# EAGLE board Fiberlink-pan2 (EAGLE 6.4)
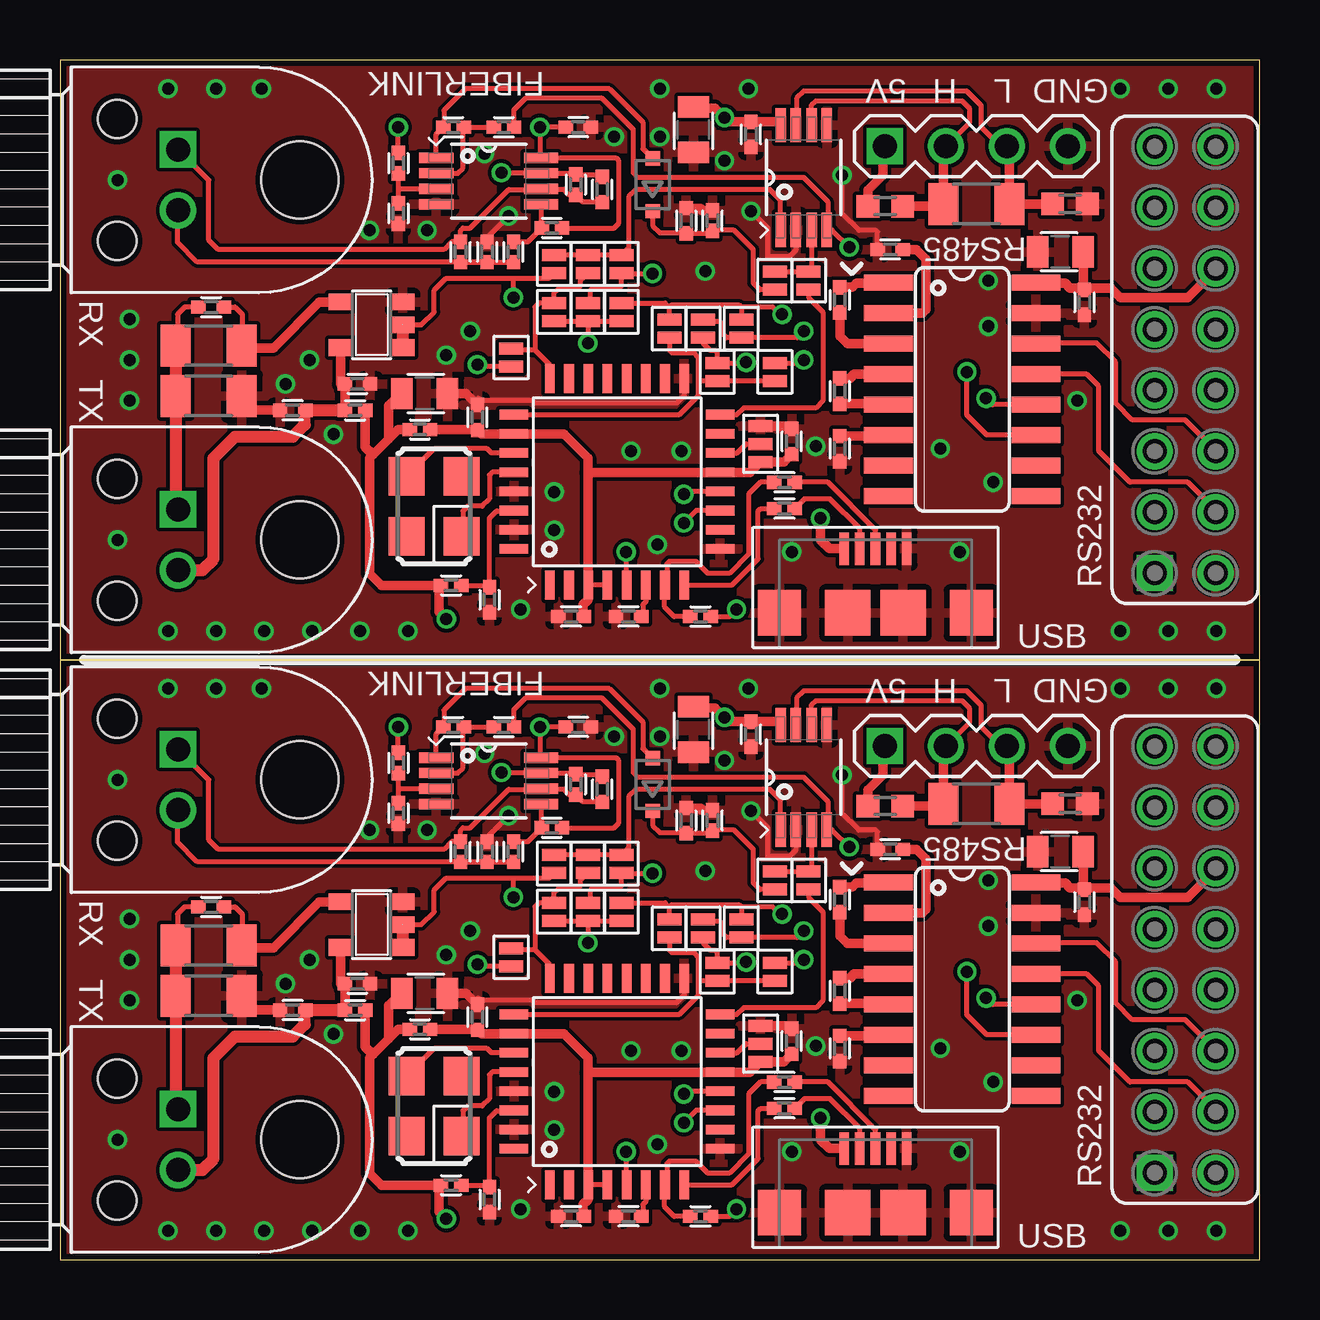
[diagram p0: board, top side]
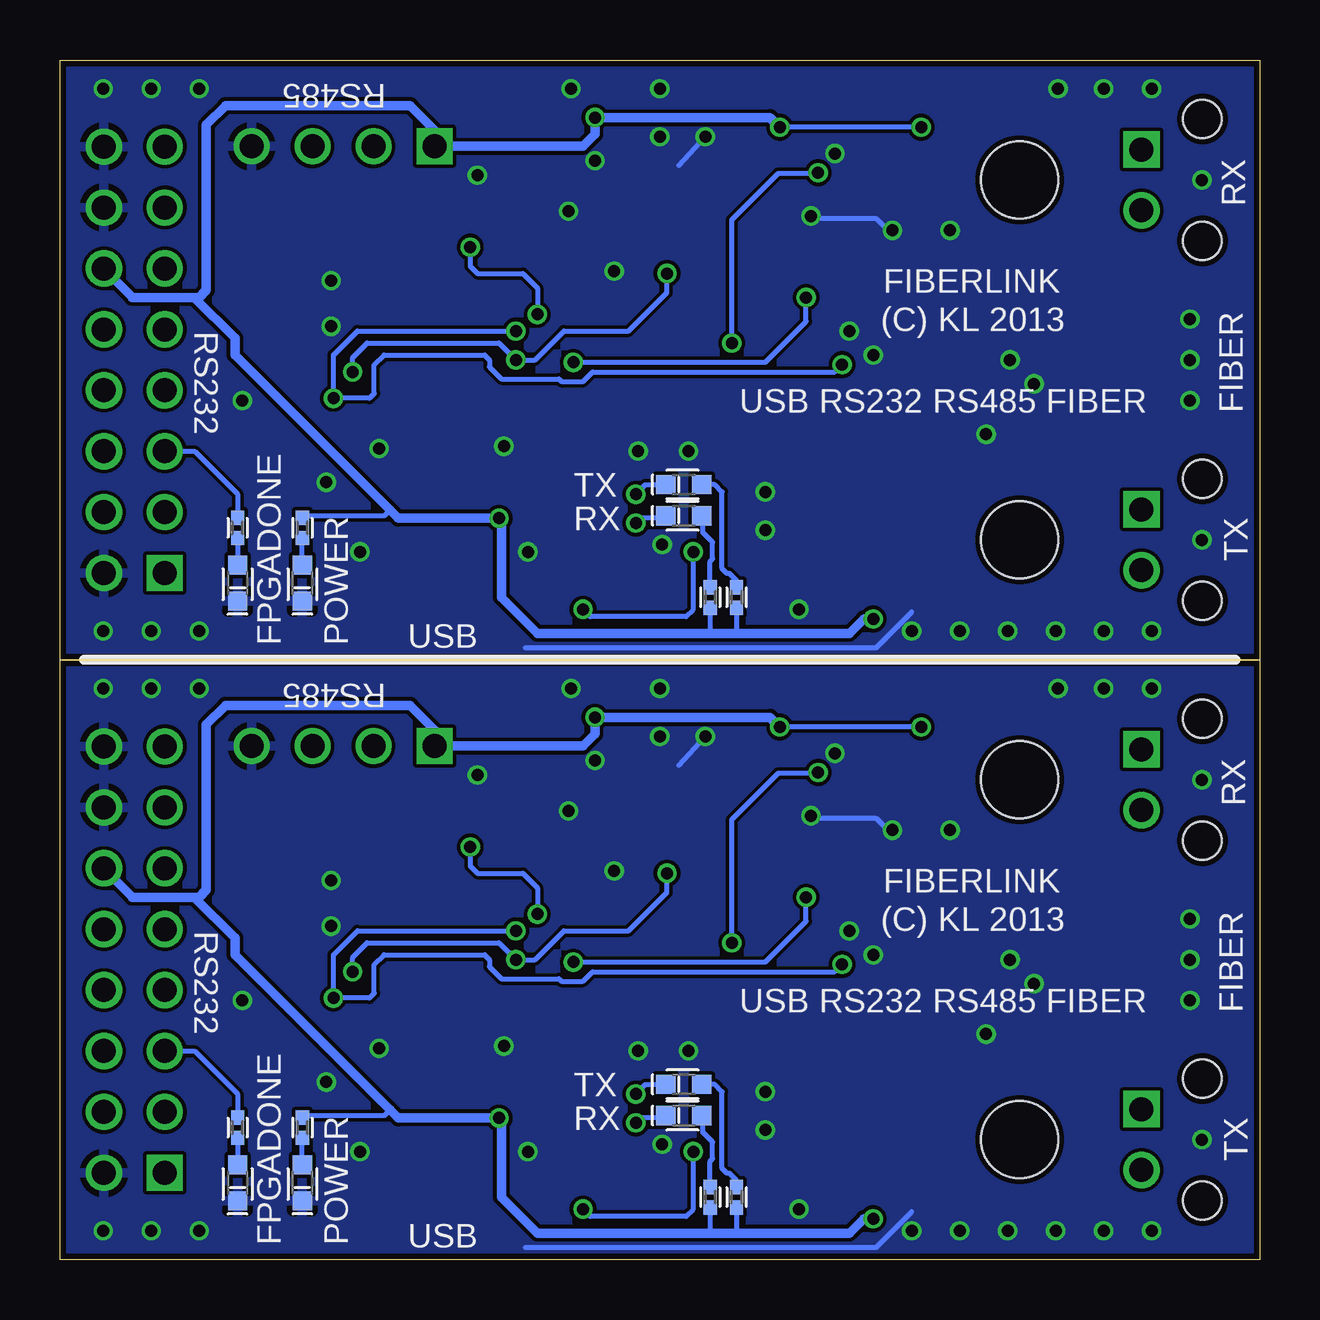
[diagram p1: board, bottom side, seen from below]

Size 50 x 50 mm. Coordinates in mm from the lower left corner, seen from the top.
Outline: 50,25 50,0 0,0 0,25
Outline: 50,25 0,25
Outline: 0,25 50,25
Outline: 50,25 50,50 0,50 0,25
Copper layers (1*16): Top 0.035mm / dielectric 1.5mm / Bottom 0.035mm
Design rules "ITEADstudio_DRC": minimum track width 6mil, minimum drill 12mil, track to track 6mil, track to pad 6mil, pad to pad 6mil, via to via 6mil, smd to smd 0mil, copper to edge 10mil, drill to drill 10mil, minimum pad ring 10mil, minimum via ring 6mil, stop-mask expansion 2mil, vias tented up to drill 100mil, thermal gap 10mil

## Footprints (pad centres in the part's own frame; a part is rotated, then mirrored left to right if it is on the bottom)
C0402 = smd 0.6 x 0.55: 1 -0.525,0; 2 0.525,0
C0805 = smd 0.9 x 1.3: 1 -0.95,0; 2 0.95,0
SOP65P490X110-8N = smd 1.422 x 0.432: 1 -2.184,0.965; 2 -2.184,0.33; 3 -2.184,-0.33; 4 -2.184,-0.965; 5 2.184,-0.965; 6 2.184,-0.33; 7 2.184,0.33; 8 2.184,0.965
SO16 = smd 0.66 x 2.032: 1 -4.445,-3.073; 2 -3.175,-3.073; 3 -1.905,-3.073; 4 -0.635,-3.073; 5 0.635,-3.073; 6 1.905,-3.073; 7 3.175,-3.073; 8 4.445,-3.073; 9 4.445,3.073; 10 3.175,3.073; 11 1.905,3.073; 12 0.635,3.073; 13 -0.635,3.073; 14 -1.905,3.073; 15 -3.175,3.073; 16 -4.445,3.073
SOT23-5 = smd 0.69 x 0.99: 1 -0.95,-1.29; 2 0,-1.29; 3 0.95,-1.29; 4 0.95,1.3; 5 -0.95,1.3
LQFP32 = smd 0.4 x 1.2: 1 -2.8,-4.3; 2 -2,-4.3; 3 -1.2,-4.3; 4 -0.4,-4.3; 5 0.4,-4.3; 6 1.2,-4.3; 7 2,-4.3; 8 2.8,-4.3; 17 2.8,4.3; 18 2,4.3; 19 1.2,4.3; 20 0.4,4.3; 21 -0.4,4.3; 22 -1.2,4.3; 23 -2,4.3; 24 -2.8,4.3 | smd 1.2 x 0.4: 9 4.3,-2.8; 10 4.3,-2; 11 4.3,-1.2; 12 4.3,-0.4; 13 4.3,0.4; 14 4.3,1.2; 15 4.3,2; 16 4.3,2.8; 25 -4.3,2.8; 26 -4.3,2; 27 -4.3,1.2; 28 -4.3,0.4; 29 -4.3,-0.4; 30 -4.3,-1.2; 31 -4.3,-2; 32 -4.3,-2.8
X_3225 = smd 1.6 x 1.5: 1 -1.25,-1.15; 2 1.25,-1.15; 3 1.25,1.15; 4 -1.25,1.15
IFO-IFX = drill 1 square: 1 -5.08,1.27 | drill 1: 2 -5.08,-1.27 | hole 3.2: 0,0 | hole 1.6: -7.62,2.54; -7.62,-2.54
CHIP-LED0603 = smd 0.8 x 0.8: A -0.75,0; C 0.75,0
R0402_VISHAY = smd 0.6 x 0.55: 1 -0.425,0; 2 0.425,0
R1206 = smd 1.25 x 1.75: 1 -1.375,0; 2 1.375,0
R0603 = smd 0.95 x 0.95: 1 -0.725,0; 2 0.725,0
SJ-SMALL = smd 0.5 x 1: 1 -0.375,0; 2 0.375,0
SJ-SMALL-TRI = smd 0.5 x 1: 1 -0.75,0; 2 0.75,0; 3 0,0
SOD323-R = smd 0.6 x 0.6: A 1.1,0; C -1.1,0
629105136821 = smd 0.4 x 1.35: 1 -1.3,0; 2 -0.65,0; 3 0,0; 4 0.65,0; 5 1.3,0 | smd 1.8 x 1.9: Z1 -4,-2.675; Z4 4,-2.675 | smd 1.9 x 1.9: Z2 -1.15,-2.675; Z3 1.15,-2.675
FE08-2 = drill 1 square: 1 -8.89,1.27 | drill 1: 2 -8.89,-1.27; 3 -6.35,1.27; 4 -6.35,-1.27; 5 -3.81,1.27; 6 -3.81,-1.27; 7 -1.27,1.27; 8 -1.27,-1.27; 9 1.27,1.27; 10 1.27,-1.27; 11 3.81,1.27; 12 3.81,-1.27; 13 6.35,1.27; 14 6.35,-1.27; 15 8.89,1.27; 16 8.89,-1.27
MA04-1 = drill 1 square: 1 -3.81,0 | drill 1: 2 -1.27,0; 3 1.27,0; 4 3.81,0

## Placement (x,y rotation side)
C1  [C0402]  22.6,19.6 90 top
C2  [C0402]  21.6,22.2 180 top
C3  [C0402]  32.5,15 270 top
C4  [C0402]  32.5,11.2 270 top
C5  [C0402]  34.6,17.1 180 top
C6  [C0402]  32.5,8.8 270 top
C7  [C0402]  42.7,14.9 270 top
C8  [C0402]  12.4,11.5 0 top
C9  [C0402]  6.3,14.7 0 top
C10  [C0402]  17.9,2.5 270 top
C11  [C0402]  23.7,1.8 180 top
C12  [C0402]  17.4,10.1 90 top
C13  [C0402]  21.3,1.8 180 top
C14  [C0402]  30.5,9.1 90 top
C15  [C0402]  28.8,21.9 90 top
C16  [C0402]  26.1,18.3 270 top
C17  [C0402]  9.7,10.4 180 top
C18  [C0805]  41.7,17 180 top
C19  [C0805]  15.2,11.1 0 top
C20  [C0805]  26.4,22.1 270 top
C21  [C0402]  22.6,44.6 90 top
C22  [C0402]  21.6,47.2 180 top
C23  [C0402]  32.5,40 270 top
C24  [C0402]  32.5,36.2 270 top
C25  [C0402]  34.6,42.1 180 top
C26  [C0402]  32.5,33.8 270 top
C27  [C0402]  42.7,39.9 270 top
C28  [C0402]  12.4,36.5 0 top
C29  [C0402]  6.3,39.7 0 top
C30  [C0402]  17.9,27.5 270 top
C31  [C0402]  23.7,26.8 180 top
C32  [C0402]  17.4,35.1 90 top
C33  [C0402]  21.3,26.8 180 top
C34  [C0402]  30.5,34.1 90 top
C35  [C0402]  28.8,46.9 90 top
C36  [C0402]  26.1,43.3 270 top
C37  [C0402]  9.7,35.4 180 top
C38  [C0805]  41.7,42 180 top
C39  [C0805]  15.2,36.1 0 top
C40  [C0805]  26.4,47.1 270 top
D1  SN65HVD3088EDMSOP  [SOP65P490X110-8N]  31,20.1 90 top
D2  MAX3232CSE  [SO16]  37.61,11.27 270 top
D3  74LVC1G08DBV  [SOT23-5]  12.99,13.96 90 top
D4  FT232BL  [LQFP32]  23.22,7.42 0 top
D5  MAX3232CSE  [SO16]  37.61,36.27 270 top
D6  74LVC1G08DBV  [SOT23-5]  12.99,38.96 90 top
D7  FT232BL  [LQFP32]  23.22,32.42 0 top
D8  SN65HVD3088EDMSOP  [SOP65P490X110-8N]  31,45.1 90 top
DRILEGEND  [DRILEGEND]  -9.63,-4.01 0 top  (outside the outline)
G1  XTAL_3225_SMD  [X_3225]  15.59,6.4 90 top
G2  XTAL_3225_SMD  [X_3225]  15.59,31.4 90 top
H1  IFE91A  [IFO-IFX]  10,5 0 top
H2  [CHIP-LED0603]  39.9,3.2 270 bottom
H3  [CHIP-LED0603]  24,7.3 180 bottom
H4  [CHIP-LED0603]  24,6 180 bottom
H5  [CHIP-LED0603]  42.6,3.2 270 bottom
H6  IFE91A  [IFO-IFX]  10,30 0 top
H7  [CHIP-LED0603]  24,32.3 180 bottom
H8  [CHIP-LED0603]  24,31 180 bottom
H9  [CHIP-LED0603]  39.9,28.2 270 bottom
H10  [CHIP-LED0603]  42.6,28.2 270 bottom
L1  [R0402_VISHAY]  15,9.6 0 top
L2  [R0402_VISHAY]  12.3,10.4 0 top
L3  [R0402_VISHAY]  15,34.6 0 top
L4  [R0402_VISHAY]  12.3,35.4 0 top
N1  MAX412CPAMSOP  [SOP65P490X110-8N]  17.87,19.95 0 top
N2  MAX412CPAMSOP  [SOP65P490X110-8N]  17.87,44.95 0 top
R1  [R0402_VISHAY]  16.7,17 90 top
R2  [R0402_VISHAY]  20.5,18 0 top
R3  [R0402_VISHAY]  17.8,17 270 top
R4  [R0402_VISHAY]  21.5,19.8 270 top
R5  [R0402_VISHAY]  18.9,17 90 top
R6  [R1206]  6.2,11 180 top
R7  [R1206]  6.2,13.1 180 top
R8  [R0402_VISHAY]  16.4,22.2 0 top
R9  [R0402_VISHAY]  14.1,18.6 270 top
R10  [R0402_VISHAY]  16.3,3.1 0 top
R11  [R0402_VISHAY]  21.8,2.6 270 bottom
R12  [R0402_VISHAY]  22.9,2.6 270 bottom
R13  [R0402_VISHAY]  39.9,5.5 270 bottom
R14  [R0402_VISHAY]  42.6,5.5 270 bottom
R15  [R0402_VISHAY]  30.2,6.3 180 top
R16  [R0402_VISHAY]  30.2,7.4 180 top
R17  [R0402_VISHAY]  16.7,42 90 top
R18  [R0402_VISHAY]  20.5,43 0 top
R19  [R0402_VISHAY]  26.7,1.8 0 top
R20  [R0402_VISHAY]  17.8,42 270 top
R21  [R0402_VISHAY]  21.5,44.8 270 top
R22  [R0402_VISHAY]  18.9,42 90 top
R23  [R1206]  6.2,36 180 top
R24  [R1206]  6.2,38.1 180 top
R25  [R1206]  38.2,19 0 top
R26  [R0603]  42.1,19 0 top
R27  [R0603]  34.4,18.9 0 top
R28  [R0402_VISHAY]  14.1,20.7 270 top
R29  [R0402_VISHAY]  18.5,22.2 0 top
R30  [R0402_VISHAY]  27.2,18.3 90 top
R31  [R0402_VISHAY]  16.4,47.2 0 top
R32  [R0402_VISHAY]  14.1,43.6 270 top
R33  [R0402_VISHAY]  16.3,28.1 0 top
R34  [R0402_VISHAY]  30.2,31.3 180 top
R35  [R0402_VISHAY]  30.2,32.4 180 top
R36  [R0402_VISHAY]  26.7,26.8 0 top
R37  [R1206]  38.2,44 0 top
R38  [R0603]  42.1,44 0 top
R39  [R0603]  34.4,43.9 0 top
R40  [R0402_VISHAY]  14.1,45.7 270 top
R41  [R0402_VISHAY]  18.5,47.2 0 top
R42  [R0402_VISHAY]  27.2,43.3 90 top
R43  [R0402_VISHAY]  21.8,27.6 270 bottom
R44  [R0402_VISHAY]  22.9,27.6 270 bottom
R45  [R0402_VISHAY]  39.9,30.5 270 bottom
R46  [R0402_VISHAY]  42.6,30.5 270 bottom
SJ1  [SJ-SMALL]  22,39.5 90 top
SJ2  [SJ-SMALL]  22,14.5 90 top
SJ3  [SJ-SMALL]  20.6,14.5 90 top
SJ4  [SJ-SMALL]  26.8,13.8 90 top
SJ5  [SJ-SMALL]  27.4,12 270 top
SJ6  [SJ-SMALL]  29.8,12 90 top
SJ7  [SJ-SMALL]  18.8,12.6 270 top
SJ8  [SJ-SMALL]  20.6,16.5 90 top
SJ9  [SJ-SMALL]  23.4,14.5 90 top
SJ10  [SJ-SMALL]  22,16.5 90 top
SJ11  [SJ-SMALL]  25.4,13.8 90 top
SJ12  [SJ-SMALL]  28.4,13.8 90 top
SJ13  [SJ-SMALL]  23.4,16.5 90 top
SJ14  [SJ-SMALL]  29.8,15.8 90 top
SJ15  [SJ-SMALL]  31.2,15.8 90 top
SJ16  [SJ-SMALL]  20.6,39.5 90 top
SJ17  SJ-TRI  [SJ-SMALL-TRI]  29.2,9 90 top
SJ18  [SJ-SMALL]  26.8,38.8 90 top
SJ19  [SJ-SMALL]  27.4,37 270 top
SJ20  [SJ-SMALL]  29.8,37 90 top
SJ21  [SJ-SMALL]  18.8,37.6 270 top
SJ22  [SJ-SMALL]  20.6,41.5 90 top
SJ23  [SJ-SMALL]  23.4,39.5 90 top
SJ24  [SJ-SMALL]  22,41.5 90 top
SJ25  [SJ-SMALL]  25.4,38.8 90 top
SJ26  [SJ-SMALL]  28.4,38.8 90 top
SJ27  [SJ-SMALL]  23.4,41.5 90 top
SJ28  [SJ-SMALL]  29.8,40.8 90 top
SJ29  [SJ-SMALL]  31.2,40.8 90 top
SJ30  SJ-TRI  [SJ-SMALL-TRI]  29.2,34 90 top
V1  IFD91  [IFO-IFX]  10,20 0 top
V2  [SOD323-R]  24.7,19.8 90 top
V3  [SOD323-R]  24.7,44.8 90 top
V4  IFD91  [IFO-IFX]  10,45 0 top
X1  629105136821  [629105136821]  33.99,4.63 0 top
X2  [FE08-2]  46.9,12.5 90 top
X3  [MA04-1]  38.2,21.4 0 top
X4  [FE08-2]  46.9,37.5 90 top
X5  629105136821  [629105136821]  33.99,29.63 0 top
X6  [MA04-1]  38.2,46.4 0 top

## Library data of the parts
C1-C40 L1-L4 R1-R46 = rcl
D1 D8 G1 G2 H1-H10 N1 N2 SJ1-SJ30 V1 V4 X1 X5 = OMAT_IC
D2 D5 = maxim; MPN: MAX3232CSE; OC_FARNELL: 9725490; OC_NEWARK: 90C2890
D3 D6 = 74xx-little-us
D4 D7 = ftdichip-3
DRILEGEND = drilegend
V2 V3 = diode
X2-X4 X6 = OMAT_IC; OC_FARNELL: unknown; OC_NEWARK: unknown

## Nets
485_HIGH: D1.6 R25.1 R27.2 X3.2
485_HIGH1: D8.6 R37.1 R39.2 X6.2
485_LOW: D1.7 R25.2 R26.1 X3.3
485_LOW1: D8.7 R37.2 R38.1 X6.3
+5V: C2.2 C7.1 C15.2 C18.1 C19.1 C20.1 D1.8 D2.16 L1.1 L2.2 N1.8 R2.2 R10.1 R11.2 R12.2 R13.1 R27.1 R28.1 X1.1 X2.12 X3.1
+5V1: C22.2 C27.1 C35.2 C38.1 C39.1 C40.1 D5.16 D8.8 L3.1 L4.2 N2.8 R18.2 R33.1 R39.1 R40.1 R43.2 R44.2 R45.1 X4.12 X5.1 X6.1
AVCC: C10.1 D4.30 R10.2
AVCC1: C30.1 D7.30 R33.2
CARRIER_SENSE: C16.2 R30.1 SJ14.1 V2.C
CARRIER_SENSE1: C36.2 R42.1 SJ28.1 V3.C
FPGADONE: R14.1 X2.5
FPGADONE1: R46.1 X4.5
G1: D4.27 G1.3
G2: D7.27 G2.3
GND: C2.1 C5.2 C6.2 C7.2 C8.2 C10.2 C11.2 C12.2 C13.2 C14.2 C15.1 C16.1 C17.2 C18.2 C19.2 C20.2 D1.2 D1.5 D2.15 D3.3 D4.9 D4.17 D4.29 D4.31 H2.C H5.C N1.4 R3.1 R6.1 R9.2 R26.2 R30.2 SJ17.2 X1.5 X1.Z1 X1.Z2 X1.Z3 X1.Z4 X2.2 X2.14 X2.16 X3.4
GND1: C22.1 C25.2 C26.2 C27.2 C28.2 C30.2 C31.2 C32.2 C33.2 C34.2 C35.1 C36.1 C37.2 C38.2 C39.2 C40.2 D5.15 D6.3 D7.9 D7.17 D7.29 D7.31 D8.2 D8.5 H9.C H10.C N2.4 R20.1 R23.1 R32.2 R38.2 R42.2 SJ30.2 X4.2 X4.14 X4.16 X5.5 X5.Z1 X5.Z2 X5.Z3 X5.Z4 X6.4
N$1: C1.1 N1.6 R1.2 R4.2 V1.1
N$2: N1.1 R8.1 V2.A
N$3: R1.1 R3.2 R5.1 V1.2
N$4: D4.12 H3.C
N$5: N1.5 R2.1 R5.2
N$6: C4.2 D2.5
N$7: C4.1 D2.4
N$8: C3.2 D2.3
N$9: C3.1 D2.1
N$10: C6.1 D2.6
N$11: C5.1 D2.2
N$12: D2.14 X2.6
N$13: D2.13 X2.4
N$14: D4.11 H4.C
N$15: C9.1 H1.1 R6.2 R7.2
N$16: N1.3 R9.1 R28.2
N$17: C9.2 D3.4 R7.1
N$18: H3.A R11.1
N$19: R15.1 X1.2
N$20: H4.A R12.1
N$21: D4.8 R15.2
N$22: H2.A R13.2
N$23: D4.7 R16.2 R19.1
N$24: R16.1 X1.3
N$25: H5.A R14.2
N$26: D4.14 SJ17.3
N$27: C21.1 N2.6 R17.2 R21.2 V4.1
N$28: R17.1 R20.2 R22.1 V4.2
N$29: D4.5 R19.2
N$30: N2.5 R18.1 R22.2
N$31: C24.2 D5.5
N$32: N1.2 R8.2 R29.1
N$33: D4.28 G1.1
N$34: C24.1 D5.4
N$35: C23.2 D5.3
N$36: C23.1 D5.1
N$37: C26.1 D5.6
N$38: C25.1 D5.2
N$39: D5.14 X4.6
N$40: C29.1 H6.1 R23.2 R24.2
N$41: C29.2 D6.4 R24.1
N$42: N2.1 R31.1 V3.A
N$43: N2.3 R32.1 R40.2
N$44: R34.1 X5.2
N$45: D7.8 R34.2
N$46: D7.7 R35.2 R36.1
N$47: R35.1 X5.3
N$48: D7.5 R36.2
N$49: D7.28 G2.1
N$50: D5.13 X4.4
N$51: N2.2 R31.2 R41.1
N$52: D7.12 H7.C
N$53: D7.11 H8.C
N$54: H7.A R43.1
N$55: H8.A R44.1
N$56: H9.A R45.2
N$57: H10.A R46.2
N$58: D7.14 SJ30.3
RXD_1: D5.12 SJ18.2 SJ21.2 SJ26.1
RXD_2: D8.1 SJ22.2 SJ24.2 SJ27.2
RXD_232: D2.12 SJ4.2 SJ7.2 SJ12.1
RXD_485: D1.1 SJ8.2 SJ10.2 SJ13.2
RXD_FIBER: C1.2 N1.7 R4.1 SJ2.1 SJ3.1 SJ9.1
RXD_FIBER1: C21.2 N2.7 R21.1 SJ1.1 SJ16.1 SJ23.1
RXD_USB: D4.24 SJ3.2 SJ7.1 SJ10.1
RXD_USB1: D7.24 SJ16.2 SJ21.1 SJ24.1
TX_VCC: C8.1 C17.1 D3.5 H1.2 L2.1
TX_VCC1: C28.1 C37.1 D6.5 H6.2 L4.1
TXD_1: D5.11 SJ1.2 SJ20.2 SJ27.1
TXD_2: D8.4 R41.2 SJ23.2 SJ25.2 SJ26.2
TXD_232: D2.11 SJ2.2 SJ6.2 SJ13.1
TXD_485: D1.4 R29.2 SJ9.2 SJ11.2 SJ12.2
TXD_FIBER: D3.1 D3.2 SJ4.1 SJ5.1 SJ8.1
TXD_FIBER1: D6.1 D6.2 SJ18.1 SJ19.1 SJ22.1
TXD_USB: D4.25 SJ5.2 SJ6.1 SJ11.1
TXD_USB1: D7.25 SJ19.2 SJ20.1 SJ25.1
TXEN_1: D8.3 SJ28.2 SJ29.2
TXEN_485: D1.3 SJ14.2 SJ15.2
TXEN_USB: D4.16 SJ15.1
TXEN_USB1: D7.16 SJ29.1
USB3V1: C31.1 D7.6
USB3V3: C11.1 D4.6
USBVCC: C12.1 C13.1 C14.1 D4.3 D4.4 D4.13 D4.26 L1.2 SJ17.1
USBVCC1: C32.1 C33.1 C34.1 D7.3 D7.4 D7.13 D7.26 L3.2 SJ30.1

## Tracks (layer width: path | path; a pad name or v marks a point on that pad's centre or on a via)
485_HIGH
  Top 0.2: D1.6 31.33,23.13 31.5,23.3 37.6,23.3 37.9,23 37.9,22.37 X3.2
  Top 0.4: X3.2 36.83,21.3 R25.1 36.73,18.9 R27.2
485_HIGH1
  Top 0.2: D8.6 31.33,48.13 31.5,48.3 37.6,48.3 37.9,48 37.9,47.37 X6.2
  Top 0.4: X6.2 36.83,46.3 R37.1 36.73,43.9 R39.2
485_LOW
  Top 0.2: X3.3 39.2,21.4 38.4,22.2 38.4,23.1 37.8,23.7 31,23.7 30.7,23.4 30.7,22.32 D1.7
  Top 0.4: X3.3 39.58,21.3 R25.2 R26.1
485_LOW1
  Top 0.2: X6.3 39.2,46.4 38.4,47.2 38.4,48.1 37.8,48.7 31,48.7 30.7,48.4 30.7,47.31 D8.7
  Top 0.4: X6.3 39.58,46.3 R37.2 R38.1
+5V  (via drill 0.5)
  Top 0.2: 29.89,22.43 D1.8 | R28.1 v14.1,22.2 | C2.2 v20,22.2 20,20.97 N1.8 20.07,20.9 23.2,20.9 23.3,20.8 23.3,18.2 23.1,18 R2.2
  Top 0.4: R27.1 33.67,19.57 34.3,20.2 34.3,21.31 X3.1 | 29.89,22.43 C15.2 27.88,22.43 v27.7,22.6 27.3,23 26.45,23 C20.1 | X2.12 48.17,16.27 47,15.1 44.2,15.1 43.8,15.5 42.73,15.5 42.73,15.45 C7.1 | R10.1 15.8,3.1 | 15.8,3.1 13.4,3.1 12.9,3.6 12.9,8.4 13.05,8.55 | X1.1 32.07,4.63 31.7,5 v31.7,5.9 | 15.8,3.1 15.8,2 v16.1,1.7 | L2.2 12.72,8.88 13.05,8.55 | D2.16 40.7,15.7 41.9,15.7 42.1,15.5 42.62,15.5 C7.1 | C18.1 42.65,15.47 C7.1 | 13.05,8.55 13.7,9.2 | 13.7,9.2 14.1,9.6 L1.1 | C19.1 14.2,11.1 13.7,10.6 13.7,9.2
  Bottom 0.2: v14.1,22.2 v20,22.2 | R11.2 21.8,1.1 | R12.2 22.9,1.1 | 36.25,6.25 36.5,6 39.83,6 R13.1
  Bottom 0.4: X3.1 34.3,21.4 | 34.3,21.4 28.2,21.4 27.7,21.9 v27.7,22.6 20.4,22.6 v20,22.2 | 34.3,21.4 34.3,22 35.4,23.1 43.1,23.1 43.9,22.3 43.9,15.4 44.2,15.1 44.4,15.1 | 46.96,15.1 47,15.1 | 44.4,15.1 46.96,15.1 | 46.96,15.1 X2.12 | 44.4,15.1 42.7,13.4 42.7,12.7 36.25,6.25 35.9,5.9 v31.7,5.9 31.6,5.8 31.6,2.6 30.1,1.1 22.9,1.1 21.8,1.1 17.1,1.1 16.5,1.7 v16.1,1.7
+5V1  (via drill 0.5)
  Top 0.2: 29.89,47.42 D8.8 | R40.1 v14.1,47.2 | C22.2 v20,47.2 20,45.97 N2.8 20.07,45.9 23.2,45.9 23.3,45.8 23.3,43.2 23.1,43 R18.2
  Top 0.4: R39.1 33.67,44.58 34.3,45.2 34.3,46.31 X6.1 | 29.89,47.42 C35.2 27.88,47.42 v27.7,47.6 27.3,48 26.45,48 C40.1 | X4.12 48.17,41.27 47,40.1 44.2,40.1 43.8,40.5 42.73,40.5 42.73,40.45 C27.1 | R33.1 15.8,28.1 | 15.8,28.1 13.4,28.1 12.9,28.6 12.9,33.4 13.05,33.55 | X5.1 32.07,29.63 31.7,30 v31.7,30.9 | 15.8,28.1 15.8,27 v16.1,26.7 | L4.2 12.72,33.88 13.05,33.55 | D5.16 40.7,40.7 41.9,40.7 42.1,40.5 42.62,40.5 C27.1 | C38.1 42.65,40.48 C27.1 | 13.05,33.55 13.7,34.2 | 13.7,34.2 14.1,34.6 L3.1 | C39.1 14.2,36.1 13.7,35.6 13.7,34.2
  Bottom 0.2: v14.1,47.2 v20,47.2 | R43.2 21.8,26.1 | R44.2 22.9,26.1 | 36.25,31.25 36.5,31 39.83,31 R45.1
  Bottom 0.4: X6.1 34.3,46.4 | 34.3,46.4 28.2,46.4 27.7,46.9 v27.7,47.6 20.4,47.6 v20,47.2 | 34.3,46.4 34.3,47 35.4,48.1 43.1,48.1 43.9,47.3 43.9,40.4 44.2,40.1 44.4,40.1 | 46.96,40.1 47,40.1 | 44.4,40.1 46.96,40.1 | 46.96,40.1 X4.12 | 44.4,40.1 42.7,38.4 42.7,37.7 36.25,31.25 35.9,30.9 v31.7,30.9 31.6,30.8 31.6,27.6 30.1,26.1 22.9,26.1 21.8,26.1 17.1,26.1 16.5,26.7 v16.1,26.7
AVCC
  Top 0.2: R10.2 17.82,3.1 C10.1 17.9,5.9 18.2,6.2 18.9,6.2 D4.30
AVCC1
  Top 0.2: R33.2 17.82,28.1 C30.1 17.9,30.9 18.2,31.2 18.9,31.2 D7.30
CARRIER_SENSE
  Top 0.2: V2.C 24.7,18.1 25,17.8 26.07,17.8 C16.2 27.1,17.77 R30.1 27.23,17.9 28.1,17.9 28.9,17.1 28.9,15.7 29.18,15.43 SJ14.1
CARRIER_SENSE1
  Top 0.2: V3.C 24.7,43.1 25,42.8 26.07,42.8 C36.2 27.1,42.77 R42.1 27.23,42.9 28.1,42.9 28.9,42.1 28.9,40.7 29.18,40.42 SJ28.1
FPGADONE
  Bottom 0.2: X2.5 44.39,8.69 42.6,6.9 R14.1
FPGADONE1
  Bottom 0.2: X4.5 44.39,33.69 42.6,31.9 R46.1
G1
  Top 0.2: D4.27 17.98,8.62 17.8,8.8 15.59,8.8 G1.3
G2
  Top 0.2: D7.27 17.98,33.62 17.8,33.8 15.59,33.8 G2.3
GND  (via drill 0.5)
  Top 0.2: D1.2 30.67,17.07 30.4,16.8 29.5,16.8 29.5,18 v28.8,18.7 | D4.17 26.02,11.02 25.7,10.7 19.8,10.7 19.7,10.8 17.43,10.8 | R3.1 17.8,17.6 v18.7,18.5 | C5.2 34.08,17.82 34,17.9 33.3,17.9 32.6,18.6 v32.6,20.2
  Top 0.4: C17.2 8.18,10.4 R6.1 | R30.2 26.77,18.73 26.7,18.8 26.12,18.8 C16.1 | C19.2 16.93,11.1 C12.2 17.4,10.78 17.43,10.8 | SJ17.2 30.38,9.75 C14.2
  Bottom 0.2: 18.7,18.4 16,18.4 15.5,17.9 | 24.2,20.6 v23.1,21.8 | 30.6,0.5 16,0.5 14.5,2
  other vias: 10.4,12.5 2.4,20 2.4,5 16.1,12.7 20.6,7 25.9,8.7 24.9,4.8 11.4,9.4 30.5,4.5 37.5,4.5 38.9,7.4 36.7,8.8 42.4,10.8 38.7,13.9 27.7,20.8 26.9,16.2 31.5,8.9 4.5,1.2 6.5,1.2 8.5,1.2 4.5,23.8 6.5,23.8 8.4,23.8 2.9,14.2 2.9,10.8 2.9,12.5 25,23.8 28.7,23.8 17.1,13.7 10.5,1.2 12.5,1.2 14.5,1.2 48.2,1.2 46.2,1.2 44.2,1.2 48.2,23.8 46.2,23.8 44.2,23.8 23.8,8.7 20.6,5.4 19.2,2.1 9.4,11.5 15.3,17.9 12.9,17.9 17.7,21.1 38.7,15.8 25,21.8
  pour Bottom: 0,0 50,0 50,25 0,25
  pour Top: 0,0 50,0 50,25 0,25
GND1  (via drill 0.5)
  Top 0.2: D8.2 30.67,42.07 30.4,41.8 29.5,41.8 29.5,43 v28.8,43.7 | D7.17 26.02,36.02 25.7,35.7 19.8,35.7 19.7,35.8 17.43,35.8 | R20.1 17.8,42.6 v18.7,43.5 | C25.2 34.08,42.83 34,42.9 33.3,42.9 32.6,43.6 v32.6,45.2
  Top 0.4: C37.2 8.18,35.4 R23.1 | R42.2 26.77,43.73 26.7,43.8 26.12,43.8 C36.1 | C39.2 16.93,36.1 C32.2 17.4,35.77 17.43,35.8 | SJ30.2 30.38,34.75 C34.2
  Bottom 0.2: 18.7,43.4 16,43.4 15.5,42.9 | 24.2,45.6 v23.1,46.8 | 30.6,25.5 16,25.5 14.5,27
  other vias: 10.4,37.5 2.4,45 2.4,30 16.1,37.7 20.6,32 25.9,33.7 24.9,29.8 11.4,34.4 30.5,29.5 37.5,29.5 38.9,32.4 36.7,33.8 42.4,35.8 38.7,38.9 27.7,45.8 26.9,41.2 31.5,33.9 4.5,26.2 6.5,26.2 8.5,26.2 4.5,48.8 6.5,48.8 8.4,48.8 2.9,39.2 2.9,35.8 2.9,37.5 25,48.8 28.7,48.8 17.1,38.7 10.5,26.2 12.5,26.2 14.5,26.2 48.2,26.2 46.2,26.2 44.2,26.2 48.2,48.8 46.2,48.8 44.2,48.8 23.8,33.7 20.6,30.4 19.2,27.1 9.4,36.5 15.3,42.9 12.9,42.9 17.7,46.1 38.7,40.8 25,46.8
  pour Bottom: 0,25 50,25 50,50 0,50
  pour Top: 0,25 50,25 50,50 0,50
N$1
  Top 0.2: V1.1 6.2,19.99 6.2,17.5 6.6,17.1 16,17.1 16.32,17.43 R1.2 16.7,17.9 16.8,18 17.1,18 18.7,19.6 20.04,19.6 N1.6 20.07,19.6 21,19.6 21.23,19.38 R4.2 21.8,19.07 C1.1
N$2
  Top 0.2: N1.1 15.69,21.91 R8.1 16,22.23 16,22.9 16.9,23.8 22.9,23.8 24.3,22.4 24.3,21.3 V2.A
N$3
  Top 0.2: R3.2 R1.1 | R1.1 5.72,16.57 4.9,17.4 4.9,18.71 V1.2 | R1.1 R5.1
N$4  (via drill 0.5)
  Top 0.2: D4.12 26,7.02 v26,6.9
  Bottom 0.2: v26,6.9 25.6,7.3 H3.C
N$5
  Top 0.2: R5.2 19.5,17.43 R2.1 20.07,18.96 N1.5
N$6
  Top 0.4: C4.2 34.5,10.68 D2.5
N$7
  Top 0.4: C4.1 32.92,11.72 33.1,11.9 D2.4
N$8
  Top 0.4: D2.3 32.83,13.18 32.5,13.5 C3.2
N$9
  Top 0.4: C3.1 33.02,15.53 33.2,15.7 34.52,15.7 D2.1
N$10
  Top 0.4: C6.1 34.5,9.32 D2.6
N$11
  Top 0.4: D2.2 35.95,14.45 36.1,14.6 36.1,16.7 35.7,17.1 C5.1
N$12
  Top 0.2: X2.6 48.17,8.73 46.9,10 44.7,10 44,10.7 44,12.4 43.2,13.2 40.71,13.2 D2.14
N$13
  Top 0.2: X2.4 48.25,6.15 47,7.4 44.6,7.4 43.3,8.7 43.3,11.4 42.8,11.9 D2.13
N$14  (via drill 0.5)
  Top 0.2: D4.11 26.52,6.22 v26,5.7
  Bottom 0.2: v26,5.7 25.8,5.9 24.85,5.9 H4.C
N$15
  Top 0.2: C9.1 5.2,14.7 4.9,14.4 4.9,13.18 R7.2
  Top 0.5: R7.2 R6.2 4.83,6.37 H1.1
N$16
  Top 0.2: R28.2 14.1,19.7 | 14.1,19.7 R9.1 | N1.3 14.18,19.62 14.1,19.7
N$17
  Top 0.2: C9.2 7.3,14.7 7.6,14.4 7.6,13.12 R7.1
  Top 0.4: D3.4 10.81,14.91 8.9,13 7.67,13 R7.1
N$18
  Bottom 0.2: R11.1 21.8,3.3 22.1,3.6 22.2,3.6 22.4,3.8 22.4,7 22.7,7.3 H3.A
N$19
  Top 0.2: X1.2 33.34,5.46 32.1,6.7 31.02,6.7 R15.1
N$20
  Bottom 0.2: R12.1 22.9,4.1 22.8,4.2 22.8,4.9 23.2,5.3 23.2,5.95 H4.A
N$21
  Top 0.2: D4.8 28.02,3.12 29.1,4.2 29.1,6.2 29.2,6.3 R15.2
N$22
  Bottom 0.2: H2.A R13.2
N$23
  Top 0.2: R16.2 29.2,7.4 28.7,6.9 28.7,4.4 27.9,3.6 27,3.6 26.5,4.1 25.4,4.1 25.3,4 25.3,3.2 D4.7 25.2,3.1 25.2,2.2 25.6,1.8 R19.1
N$24
  Top 0.2: X1.3 33.99,5.41 32,7.4 R16.1
N$25
  Bottom 0.2: R14.2 H5.A
N$26
  Top 0.2: D4.14 28.22,8.62 28.6,9 SJ17.3
N$27
  Top 0.2: V4.1 6.2,44.99 6.2,42.5 6.6,42.1 16,42.1 16.32,42.42 R17.2 16.7,42.9 16.8,43 17.1,43 18.7,44.6 20.04,44.6 N2.6 20.07,44.6 21,44.6 21.23,44.38 R21.2 21.8,44.08 C21.1
N$28
  Top 0.2: R20.2 R17.1 | R17.1 5.72,41.58 4.9,42.4 4.9,43.71 V4.2 | R17.1 R22.1
N$29  (via drill 0.5)
  Top 0.2: v23.6,4.5 23.6,3.14 D4.5 | R19.2 27.9,1.8 v28.2,2.1
  Bottom 0.2: v23.6,4.5 23.6,2.1 23.9,1.8 27.9,1.8 v28.2,2.1
N$30
  Top 0.2: R22.2 19.5,42.42 R18.1 20.07,43.96 N2.5
N$31
  Top 0.4: C24.2 34.5,35.67 D5.5
N$32
  Top 0.2: R29.1 R8.2 16.8,22.18 16.8,20.5 16.58,20.28 N1.2
N$33
  Top 0.2: D4.28 18.02,7.82 17.9,7.7 17.9,6.7 17.6,6.4 17,6.4 16.8,6.2 16.8,5.21 G1.1
N$34
  Top 0.4: C24.1 32.92,36.73 33.1,36.9 D5.4
N$35
  Top 0.4: D5.3 32.83,38.17 32.5,38.5 C23.2
N$36
  Top 0.4: C23.1 33.02,40.52 33.2,40.7 34.52,40.7 D5.1
N$37
  Top 0.4: C26.1 34.5,34.33 D5.6
N$38
  Top 0.4: D5.2 35.95,39.45 36.1,39.6 36.1,41.7 35.7,42.1 C25.1
N$39
  Top 0.2: X4.6 48.17,33.73 46.9,35 44.7,35 44,35.7 44,37.4 43.2,38.2 40.71,38.2 D5.14
N$40
  Top 0.2: C29.1 5.2,39.7 4.9,39.4 4.9,38.17 R24.2
  Top 0.5: R24.2 R23.2 4.83,31.36 H6.1
N$41
  Top 0.2: C29.2 7.3,39.7 7.6,39.4 7.6,38.12 R24.1
  Top 0.4: D6.4 10.81,39.91 8.9,38 7.67,38 R24.1
N$42
  Top 0.2: N2.1 15.69,46.91 R31.1 16,47.23 16,47.9 16.9,48.8 22.9,48.8 24.3,47.4 24.3,46.3 V3.A
N$43
  Top 0.2: R40.2 14.1,44.7 | 14.1,44.7 R32.1 | N2.3 14.18,44.62 14.1,44.7
N$44
  Top 0.2: X5.2 33.34,30.46 32.1,31.7 31.02,31.7 R34.1
N$45
  Top 0.2: D7.8 28.02,28.12 29.1,29.2 29.1,31.2 29.2,31.3 R34.2
N$46
  Top 0.2: R35.2 29.2,32.4 28.7,31.9 28.7,29.4 27.9,28.6 27,28.6 26.5,29.1 25.4,29.1 25.3,29 25.3,28.2 D7.7 25.2,28.1 25.2,27.2 25.6,26.8 R36.1
N$47
  Top 0.2: X5.3 33.99,30.41 32,32.4 R35.1
N$48  (via drill 0.5)
  Top 0.2: v23.6,29.5 23.6,28.14 D7.5 | R36.2 27.9,26.8 v28.2,27.1
  Bottom 0.2: v23.6,29.5 23.6,27.1 23.9,26.8 27.9,26.8 v28.2,27.1
N$49
  Top 0.2: D7.28 18.02,32.82 17.9,32.7 17.9,31.7 17.6,31.4 17,31.4 16.8,31.2 16.8,30.21 G2.1
N$50
  Top 0.2: X4.4 48.25,31.15 47,32.4 44.6,32.4 43.3,33.7 43.3,36.4 42.8,36.9 D5.13
N$51
  Top 0.2: R41.1 R31.2 16.8,47.17 16.8,45.5 16.58,45.28 N2.2
N$52  (via drill 0.5)
  Top 0.2: D7.12 26,32.02 v26,31.9
  Bottom 0.2: v26,31.9 25.6,32.3 H7.C
N$53  (via drill 0.5)
  Top 0.2: D7.11 26.52,31.22 v26,30.7
  Bottom 0.2: v26,30.7 25.8,30.9 24.85,30.9 H8.C
N$54
  Bottom 0.2: R43.1 21.8,28.3 22.1,28.6 22.2,28.6 22.4,28.8 22.4,32 22.7,32.3 H7.A
N$55
  Bottom 0.2: R44.1 22.9,29.1 22.8,29.2 22.8,29.9 23.2,30.3 23.2,30.95 H8.A
N$56
  Bottom 0.2: H9.A R45.2
N$57
  Bottom 0.2: R46.2 H10.A
N$58
  Top 0.2: D7.14 28.22,33.62 28.6,34 SJ30.3
RXD_1  (via drill 0.5)
  Top 0.2: D5.12 38.87,35.63 v38.6,35.9 | v31,38.7 30.73,38.42 SJ26.1 27.77,38.42 27.6,38.6 27.6,39 27.5,39.1 26.88,39.1 SJ18.2 | SJ21.2 17.48,37.23 v17.4,37.3
  Bottom 0.2: v31,38.7 37.6,38.7 38.6,37.7 v38.6,35.9 37.1,35.9 36.9,36.1 36.9,37.3 36.5,37.7 32.3,37.7 32.1,37.5 32.1,37.2 31.6,36.7 29.2,36.7 29.1,36.6 28.2,36.6 27.8,37 17.7,37 v17.4,37.3
RXD_2
  Top 0.2: D8.1 30.04,44.16 29.6,44.6 24,44.6 23.7,44.3 23.7,42.17 SJ27.2 SJ24.2 SJ22.2
RXD_232  (via drill 0.5)
  Top 0.2: D2.12 38.87,10.63 v38.6,10.9 | v31,13.7 30.73,13.43 SJ12.1 27.77,13.43 27.6,13.6 27.6,14 27.5,14.1 26.88,14.1 SJ4.2 | SJ7.2 17.48,12.22 v17.4,12.3
  Bottom 0.2: v31,13.7 37.6,13.7 38.6,12.7 v38.6,10.9 37.1,10.9 36.9,11.1 36.9,12.3 36.5,12.7 32.3,12.7 32.1,12.5 32.1,12.2 31.6,11.7 29.2,11.7 29.1,11.6 28.2,11.6 27.8,12 17.7,12 v17.4,12.3
RXD_485
  Top 0.2: D1.1 30.04,19.16 29.6,19.6 24,19.6 23.7,19.3 23.7,17.18 SJ13.2 SJ10.2 SJ8.2
RXD_FIBER  (via drill 0.5)
  Top 0.2: C1.2 22.5,20.23 R4.1 21.45,20.28 N1.7 20.04,20.3 v18.4,20.3 | SJ3.1 SJ2.1 | SJ2.1 SJ9.1 | SJ2.1 v22,13.2
  Bottom 0.2: v22,13.2 22,18.34 N1.7 18.42,20.28 v18.4,20.3
RXD_FIBER1  (via drill 0.5)
  Top 0.2: C21.2 22.5,45.23 R21.1 21.45,45.28 N2.7 20.04,45.3 v18.4,45.3 | SJ16.1 SJ1.1 | SJ1.1 SJ23.1 | SJ1.1 v22,38.2
  Bottom 0.2: v22,38.2 22,43.34 N2.7 18.42,45.28 v18.4,45.3
RXD_USB
  Top 0.2: SJ10.1 21.7,15.82 21.7,15.6 21.6,15.5 20.8,15.5 20.6,15.3 SJ3.2 19.98,14.88 19.8,14.7 19.8,12.9 | D4.24 20.42,12.28 19.8,12.9 | 19.8,12.9 18.88,12.9 SJ7.1
RXD_USB1
  Top 0.2: SJ24.1 21.7,40.83 21.7,40.6 21.6,40.5 20.8,40.5 20.6,40.3 SJ16.2 19.98,39.88 19.8,39.7 19.8,37.9 | D7.24 20.42,37.28 19.8,37.9 | 19.8,37.9 18.88,37.9 SJ21.1
TX_VCC
  Top 0.2: 11.69,11.48 11.86,11.48 C8.1
  Top 0.4: D3.5 11.69,11.48 | L2.1 C8.1
  Top 0.5: H1.2 5.93,3.73 6.4,4.2 6.4,8.4 7.3,9.3 9.7,9.3 10.2,9.8 10.2,10.38 C17.1 L2.1
TX_VCC1
  Top 0.2: 11.69,36.48 11.86,36.48 C28.1
  Top 0.4: D6.5 11.69,36.48 | L4.1 C28.1
  Top 0.5: H6.2 5.93,28.73 6.4,29.2 6.4,33.4 7.3,34.3 9.7,34.3 10.2,34.8 10.2,35.38 C37.1 L4.1
TXD_1  (via drill 0.5)
  Top 0.2: D5.11 38.63,34.37 37.8,35.2 v37.8,37 | SJ20.2 30.88,37.38 v31,37.5 | SJ27.1 23.4,41.1 | SJ1.2 22.1,39.98 22.1,40.4 22.2,40.5 23.3,40.5 23.4,40.6 23.4,41.1 | 23.4,41.1 v24.7,41.1
  Bottom 0.2: v37.8,37 37.8,37.6 37.2,38.2 31.7,38.2 v31,37.5 30.2,37.5 29,38.7 26.3,38.7 24.7,40.3 v24.7,41.1
TXD_2  (via drill 0.5)
  Top 0.2: R41.2 18.93,47.92 19.4,48.4 22.6,48.4 23.9,47.1 23.9,45.3 24.1,45.1 31,45.1 32,44.1 32,42.95 D8.4 32.18,42.92 v32.9,42.2 | SJ25.2 25.4,39.7 | 25.4,39.7 25.5,39.8 28.3,39.8 28.4,39.7 | 28.4,39.7 SJ26.2 | SJ23.2 25.23,39.88 25.4,39.7 | v30.1,39.4 30,39.4 29.7,39.7 28.4,39.7
  Bottom 0.2: v32.9,42.2 32.9,41.4 32.6,41.1 30.7,41.1 30.1,40.5 v30.1,39.4
TXD_232  (via drill 0.5)
  Top 0.2: D2.11 38.63,9.37 37.8,10.2 v37.8,12 | SJ6.2 30.88,12.38 v31,12.5 | SJ13.1 23.4,16.1 | SJ2.2 22.1,14.97 22.1,15.4 22.2,15.5 23.3,15.5 23.4,15.6 23.4,16.1 | 23.4,16.1 v24.7,16.1
  Bottom 0.2: v37.8,12 37.8,12.6 37.2,13.2 31.7,13.2 v31,12.5 30.2,12.5 29,13.7 26.3,13.7 24.7,15.3 v24.7,16.1
TXD_485  (via drill 0.5)
  Top 0.2: R29.2 18.93,22.93 19.4,23.4 22.6,23.4 23.9,22.1 23.9,20.3 24.1,20.1 31,20.1 32,19.1 32,17.95 D1.4 32.18,17.92 v32.9,17.2 | SJ11.2 25.4,14.7 | 25.4,14.7 25.5,14.8 28.3,14.8 28.4,14.7 | 28.4,14.7 SJ12.2 | SJ9.2 25.23,14.88 25.4,14.7 | v30.1,14.4 30,14.4 29.7,14.7 28.4,14.7
  Bottom 0.2: v32.9,17.2 32.9,16.4 32.6,16.1 30.7,16.1 30.1,15.5 v30.1,14.4
TXD_FIBER  (via drill 0.5)
  Top 0.2: v28.6,12.4 28.57,12.38 SJ5.1 27.4,12.8 27.3,12.9 27.1,12.9 26.8,13.2 SJ4.1 | D3.2 15.06,13.96 15.6,14.5 15.6,15.4 16.1,15.9 18.9,15.9 | v18.9,15.1 18.9,15.9 | 18.9,15.9 20.38,15.9 SJ8.1
  Top 0.5: D3.2 D3.1
  Bottom 0.2: v28.6,12.4 20.6,12.4 18.9,14.1 v18.9,15.1
TXD_FIBER1  (via drill 0.5)
  Top 0.2: v28.6,37.4 28.57,37.38 SJ19.1 27.4,37.8 27.3,37.9 27.1,37.9 26.8,38.2 SJ18.1 | D6.2 15.06,38.96 15.6,39.5 15.6,40.4 16.1,40.9 18.9,40.9 | v18.9,40.1 18.9,40.9 | 18.9,40.9 20.38,40.9 SJ22.1
  Top 0.5: D6.2 D6.1
  Bottom 0.2: v28.6,37.4 20.6,37.4 18.9,39.1 v18.9,40.1
TXD_USB
  Top 0.2: SJ11.1 25.4,12.9 25.5,12.8 26.4,12.8 26.6,12.6 26.6,11.6 | 26.6,11.6 26.6,11 25.82,10.22 D4.25 | SJ6.1 SJ5.2 26.62,11.62 26.6,11.6
TXD_USB1
  Top 0.2: SJ25.1 25.4,37.9 25.5,37.8 26.4,37.8 26.6,37.6 26.6,36.6 | 26.6,36.6 26.6,36 25.82,35.22 D7.25 | SJ20.1 SJ19.2 26.62,36.62 26.6,36.6
TXEN_1
  Top 0.2: SJ28.2 SJ29.2 31.33,41.3 D8.3
TXEN_485
  Top 0.2: SJ14.2 SJ15.2 31.33,16.3 D1.3
TXEN_USB
  Top 0.2: SJ15.1 31.2,15.1 31.8,14.5 31.8,10.8 31.5,10.5 28.5,10.5 28.2,10.2 27.54,10.2 D4.16
TXEN_USB1
  Top 0.2: SJ29.1 31.2,40.1 31.8,39.5 31.8,35.8 31.5,35.5 28.5,35.5 28.2,35.2 27.54,35.2 D7.16
USB3V1
  Top 0.2: D7.6 24.42,27.42 24.3,27.3 24.3,26.88 C31.1
USB3V3
  Top 0.2: D4.6 24.42,2.42 24.3,2.3 24.3,1.88 C11.1
USBVCC
  Top 0.2: 18.9,9.4 D4.26 | 27.54,7.8 D4.13 | D4.4 D4.3
  Top 0.4: 22,7.8 22,8.4 21,9.4 18.9,9.4 17.57,9.4 C12.1 17.38,9.6 L1.2 | 22,7.8 22,3.14 | 22,3.14 D4.3 | 22,7.8 27.54,7.8 28.75,7.8 SJ17.1 30.18,8.25 C14.1 | 22,3.14 22,2.5 21.8,2.3 21.8,1.82 C13.1
USBVCC1
  Top 0.2: 18.9,34.4 D7.26 | 27.54,32.8 D7.13 | D7.4 D7.3
  Top 0.4: 22,32.8 22,33.4 21,34.4 18.9,34.4 17.57,34.4 C32.1 17.38,34.6 L3.2 | 22,32.8 22,28.14 | 22,28.14 D7.3 | 22,32.8 27.54,32.8 28.75,32.8 SJ30.1 30.18,33.25 C34.1 | 22,28.14 22,27.5 21.8,27.3 21.8,26.82 C33.1

## Text on the board
tNames: FIBERLINK | 5V | H | L | GND | RS485 | RX | TX | RS232 | USB | FIBERLINK | 5V | H | L | GND | RS485 | RX | TX | RS232 | USB
bNames: RS485 | RX | FIBERLINK | FIBER | (C) KL 2013 | RS232 | USB RS232 RS485 FIBER | TX | RX | TX | USB | POWER | FPGADONE | RS485 | RX | FIBERLINK | (C) KL 2013 | FIBER | RS232 | USB RS232 RS485 FIBER | TX | RX | TX | POWER | FPGADONE | USB